# EAGLE board Servo (EAGLE 9.7.0)

Size 267.91 x 102.83 mm. Coordinates in mm from the lower left corner, seen from the top.
Outline: 0,0 267.91,0 267.91,102.83 0,102.83 0,0
Copper layers (1*16): Top 0.035mm / dielectric 1.5mm / Bottom 0.035mm
Design rules "default": minimum track width 6mil, minimum drill 0.35mm, track to track 6mil, track to pad 6mil, pad to pad 6mil, via to via 6mil, smd to smd 6mil, copper to edge 40mil, drill to drill 6mil, minimum pad ring 10mil, minimum via ring 8mil, stop-mask expansion 4mil, vias tented up to drill 0mil, thermal gap 10mil

## Footprints (pad centres in the part's own frame; a part is rotated, then mirrored left to right if it is on the bottom)
CAP-THRU-2.54MM = drill 1.016 pad 1.88: 1 -1.27,0; 2 1.27,0
SENRD254W50D503H320B = drill 0.7 pad 1.3: 1 -1.27,0; 2 1.27,0
HA-06-SM065 = drill 1 pad 1.676: 1 -2.54,-2.54; 2 0,2.54; 3 2.54,-2.54
SG90 = drill 1.016 long: 1 -2.54,0; 2 0,0; 3 2.54,0
ARDUINO-UNO-R3-SHIELD = drill 1.016 pad 1.88: 3.3V 24.13,-2.54; 5V 24.13,0; A0 24.13,12.7; A1 24.13,15.24; A2 24.13,17.78; A3 24.13,20.32; A4 24.13,22.86; A5 24.13,25.4; AREF -24.13,-13.97; D2 -24.13,20.32; D3 -24.13,17.78; D4 -24.13,15.24; D5 -24.13,12.7; D6 -24.13,10.16; D7 -24.13,7.62; D8 -24.13,3.81; D9 -24.13,1.27; D10 -24.13,-1.27; D11 -24.13,-3.81; D12 -24.13,-6.35; D13 -24.13,-8.89; GND@0 24.13,2.54; GND@1 24.13,5.08; GND@2 -24.13,-11.43; IOREF 24.13,-7.62; NC 24.13,-10.16; RES 24.13,-5.08; RX -24.13,25.4; SCL -24.13,-19.05; SDA -24.13,-16.51; TX -24.13,22.86; VIN 24.13,7.62

## Placement (x,y rotation side)
C1  470u  [CAP-THRU-2.54MM]  34.16,5.97 0 top
C2  470u  [CAP-THRU-2.54MM]  57.02,23.75 0 top
Q1  PHOTOTRANSISTOR  [SENRD254W50D503H320B]  262.16,52.36 180 top
RPOT1  10k  [HA-06-SM065]  22.73,16.13 180 top
SERVO1  SERVOSG90  [SG90]  94.54,48.06 180 top
U2  ARDUINO-UNO-R3-SHIELD  [ARDUINO-UNO-R3-SHIELD]  47.88,72.99 270 top

## Library data of the parts
C1 C2 Q1 RPOT1 SERVO1 U2 = Tinkercad

## Nets
U2_5V: C1.1 C2.2 RPOT1.3 SERVO1.2 U2.5V
U2_A0: RPOT1.2 U2.A0
U2_D9: SERVO1.3 U2.D9
U2_GND: C1.2 C2.1 RPOT1.1 SERVO1.1 U2.GND@0 U2.GND@1 U2.GND@2

## Tracks (layer width: path | path; a pad name or v marks a point on that pad's centre or on a via)
U2_5V  (4 unrouted)
U2_A0  (1 unrouted)
U2_D9  (1 unrouted)
U2_GND  (6 unrouted)